# Altium PCB MOTHERBOARD.PcbDoc (part 3 of 3)
Units mil, origin at the board's own origin, x right, y up, seen from the top; angles counter-clockwise.
Board outline 7367.75 x 3037.04 mil, 4 copper layers (Top Layer, Top, Mid-Layer 1, Mid-Layer 2, Bottom Layer, Bottom), stack 18.2 mil thick; 247 components, 239 nets, 1097 pads, 323 vias.
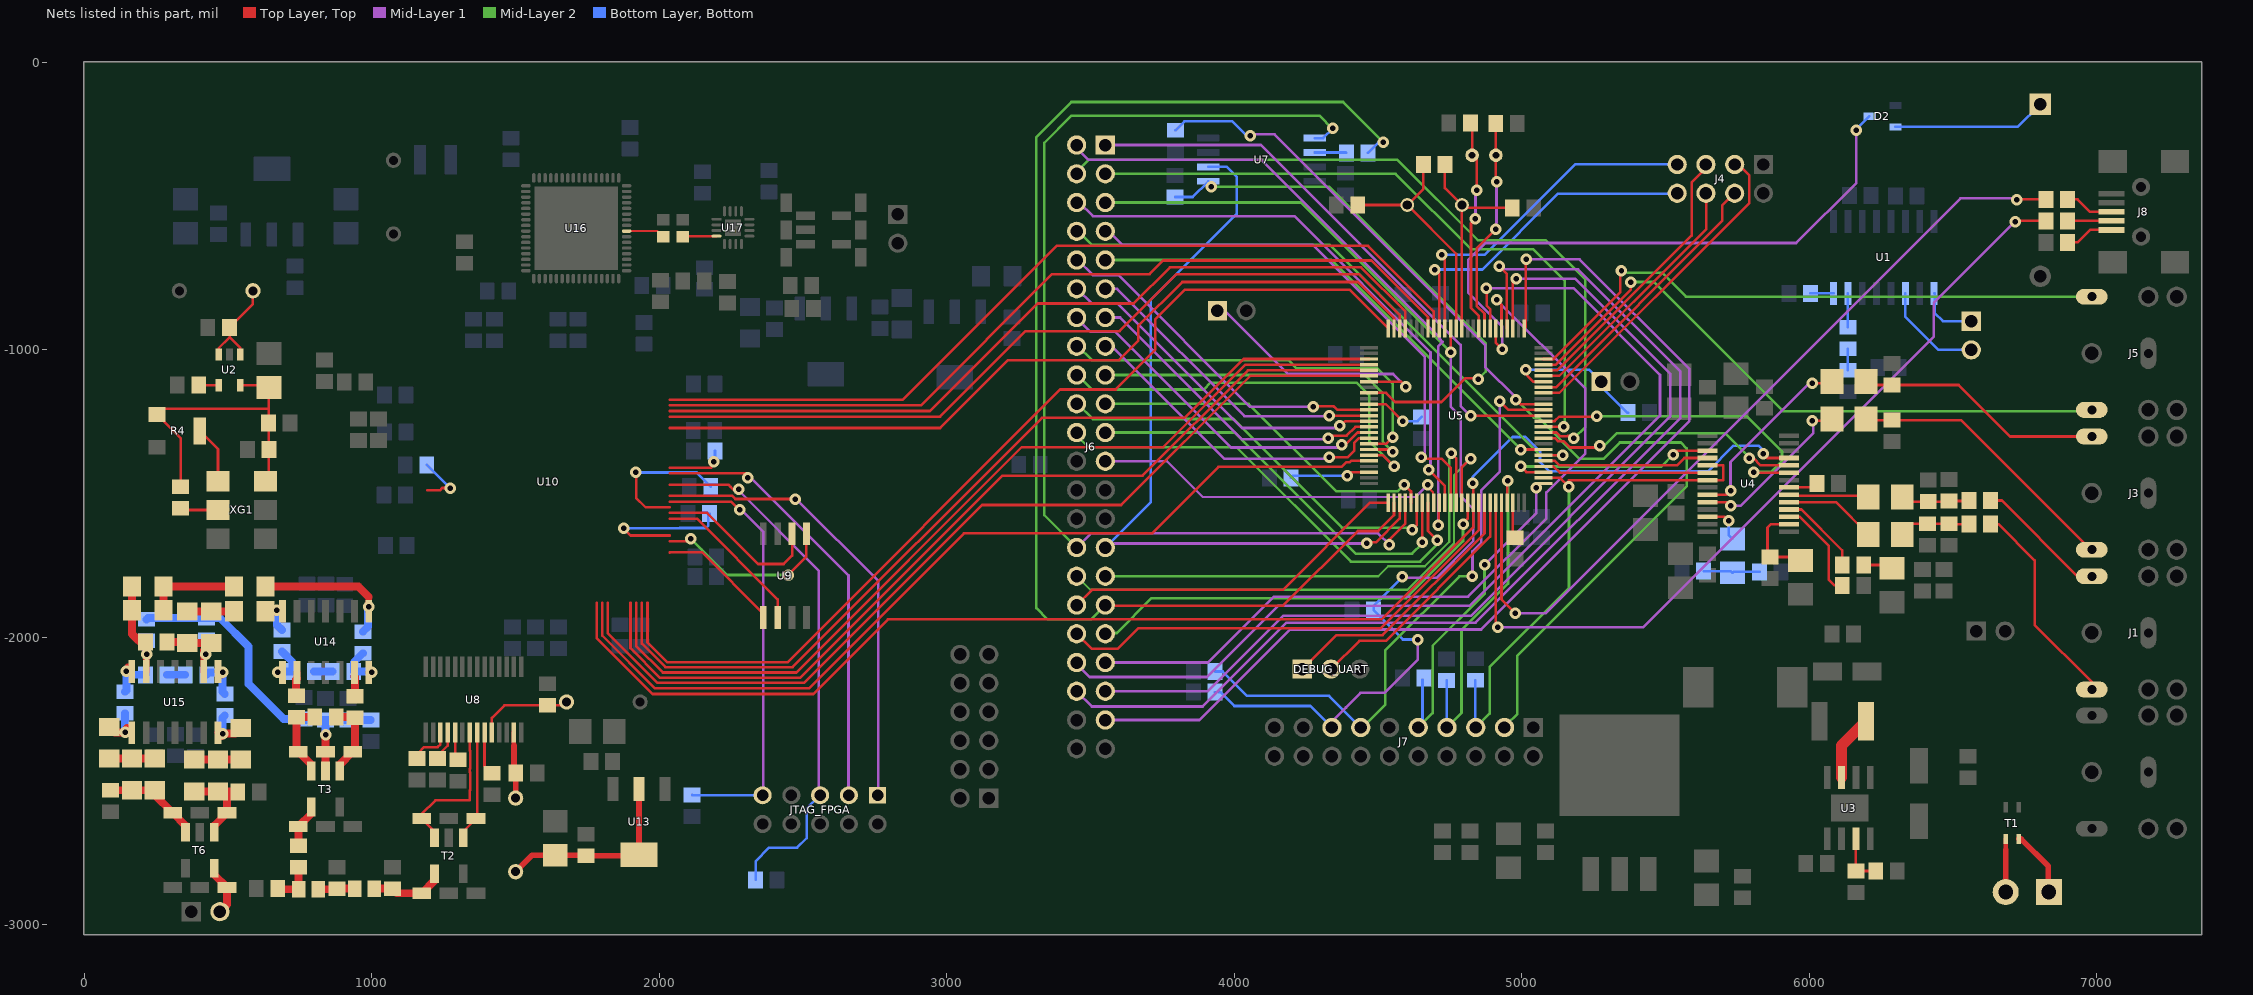
[diagram p5: the nets of this part, all layers, seen from the top]

## Via types
v1: diameter 40, hole 19.12, Top Layer, Top to Bottom Layer, Bottom, tented both sides, 262 vias
v2: diameter 40, hole 19.13, Top Layer, Top to Bottom Layer, Bottom, tented both sides, 51 vias
v3: diameter 157.48, hole 118.11, Top Layer, Top to Bottom Layer, Bottom, 6 vias
v4: diameter 40, hole 19.12, Top Layer, Top to Bottom Layer, Bottom, 3 vias
v5: diameter 19.68, hole 7.87, Top Layer, Top to Bottom Layer, Bottom, tented both sides, 1 vias

## Nets (pads, with @x,y where several pads share a name; then routed paths per layer and width w, separated by ;. In a path a pad name is that pad's centre, name@x,y a point inside that pad or via, vN(x,y) a via of type N, cw(c..) or ccw(c..) an arc to the next point about the centre after c; other vN are vias at no path point) (continued)
NetR69_1: R69.1 U17.8 | length 118.9
  Top Layer, Top w7.87: R69.1@2080.71,-606.3 2082.68,-604.33 U17.8@2198.82,-604.33
NetR69_2: R69.2 U16.8 | length 136.1
  Top Layer, Top w7.87: U16.8@1885.83,-586.61 1992.13,-586.61 2011.81,-606.3 R69.2@2013.78,-606.3
PA0: U5.22 U10.31 | length 2888.8
  Top Layer, Top w9.06: U10.31@2035.43,-1212.6 2940.94,-1212.6 3314.96,-838.58 3649.61,-838.58 3775.59,-712.6 4440.94,-712.6 4594.49,-866.14 U5.22@4594.49,-925.2
PA1: U5.23 U10.30 | length 2850.8
  Top Layer, Top w9.06: U10.30@2035.43,-1232.28 2976.38,-1232.28 3273.66,-935 3600.43,-935 3799.21,-736.22 4433.07,-736.22 4574.8,-877.95 U5.23@4574.8,-925.2
PA2: U5.24 U10.28 | length 2847.7
  Top Layer, Top w9.06: U10.28@2035.43,-1271.65 2976.38,-1271.65 3208.03,-1040 3212.6,-1035.43 3598.43,-1035.43 3665.35,-968.5 3665.35,-917.32 3818.9,-763.78 4429.13,-763.78 4555.12,-889.76 U5.24@4555.12,-925.2
PA3: U5.25 U10.144 | length 3397.2
  Top Layer, Top w9.06: U10.144@1958.66,-1879.92 1958.66,-2017.4 2027.88,-2086.61 2444.88,-2086.61 3393.7,-1137.8 3586.61,-1137.8 3724.41,-1000 3724.41,-893.7 3826.77,-791.34 4401.57,-791.34 U5.25@4535.43,-925.2
PA4: U5.28 U10.143 | length 3149.2
  Top Layer, Top w9.06: U10.143@1938.98,-1879.92 1938.98,-2021.65 2020.87,-2103.54 2463.39,-2103.54 3330.71,-1236.22 3826.77,-1236.22 4031.5,-1031.5 U5.28@4468.5,-1031.5
PA5: U5.29 U10.142 | length 3180.7
  Top Layer, Top w9.06: U10.142@1919.29,-1879.92 1919.29,-2029.53 2011.81,-2122.05 2476.38,-2122.05 3259.84,-1338.58 3751.97,-1338.58 4039.37,-1051.18 U5.29@4468.5,-1051.18
PA6: U5.30 U10.141 | length 3212.2
  Top Layer, Top w9.06: U10.141@1899.61,-1879.92 1899.61,-2037.4 2002.76,-2140.55 2489.37,-2140.55 3192.91,-1437.01 3681.1,-1437.01 4047.24,-1070.87 U5.30@4468.5,-1070.87
PA7: U5.31 U10.137 | length 3266.8
  Top Layer, Top w9.06: U10.137@1820.87,-1879.92 1820.87,-1986.22 1992.13,-2157.48 2503.94,-2157.48 3122.05,-1539.37 3606.3,-1539.37 4055.12,-1090.55 U5.31@4468.5,-1090.55
PA8: J6.36 U5.67 | length 1686.5
  Top Layer, Top w9.06: J6.36@3451.18,-1987.4 3503.15,-2039.37 3594.49,-2039.37 3665.35,-1968.5 4507.87,-1968.5 4850.39,-1625.98 U5.67@4850.39,-1531.5
PA9: DEBUG_UART.1 U5.68 | length 935.8
  Top Layer, Top w9.06: DEBUG_UART.1@4236.22,-2110.24 4354.33,-1992.13 4515.75,-1992.13 4870.08,-1637.8 U5.68@4870.08,-1531.5
PA10: DEBUG_UART.2 U5.69 | length 862.5
  Top Layer, Top w9.06: DEBUG_UART.2@4336.22,-2110.24 4434.65,-2011.81 4527.56,-2011.81 4889.76,-1649.61 U5.69@4889.76,-1531.5
PA15: J7.5 R35.2 U4.5 U4.7 U5.77 | length 1905.2
  Top Layer, Top w9.06: U5.77@5074.8,-1444.88 5133.37,-1444.88 v1(5163.74,-1475.25) 5163.74,-1452.76 5700.79,-1452.76 5700.79,-1401.57 U4.5@5645.67,-1401.57
  Mid-Layer 2 w9.06: J7.5@4839.37,-2313.39 4887.78,-2264.98 4887.78,-2103.63 5163.74,-1827.67 v1(5163.74,-1475.25)
  Bottom Layer, Bottom w9.06: R35.2@4837.89,-2148.69 4837.89,-2311.91 J7.5@4839.37,-2313.39
PB6: J4.3 U5.92 | length 1152.2
  Top Layer, Top w9.06: U5.92@5074.8,-1149.61 5129.92,-1149.61 5791.34,-488.19 5791.34,-393.7 5752.76,-355.12 J4.3@5740.16,-355.12
PB7: J4.4 U5.93 | length 975.8
  Top Layer, Top w9.06: U5.93@5074.8,-1129.92 5118.11,-1129.92 5696.85,-551.18 5696.85,-498.43 J4.4@5740.16,-455.12
PB8: J4.6 U5.95 | length 903.2
  Top Layer, Top w9.06: U5.95@5074.8,-1090.55 5129.92,-1090.55 5641.73,-578.74 5641.73,-456.69 J4.6@5640.16,-455.12
PB9: J4.5 U5.96 | length 995.4
  Top Layer, Top w9.06: U5.96@5074.8,-1070.87 5122.05,-1070.87 5590.55,-602.36 5590.55,-417.32 5652.76,-355.12 J4.5@5640.16,-355.12
PB10: U5.46 U10.136 | length 3185.1
  Top Layer, Top w9.06: U10.136@1801.18,-1879.92 1801.18,-1994.09 1984.25,-2177.17 2519.69,-2177.17 3059.06,-1637.8 3712.6,-1637.8 3943.98,-1406.42 4373.11,-1406.42 4388.58,-1390.94 4400.71,-1390.94 4405.83,-1385.83 U5.46@4468.5,-1385.83
PB12: J6.34 U5.51 | length 1231.7
  Top Layer, Top w9.06: J6.34@3451.18,-1887.4 3503.94,-1834.65 4169.29,-1834.65 4472.44,-1531.5 U5.51@4535.43,-1531.5
PB13: J6.33 R40.2 U5.52 | length 4483
  Top Layer, Top w9.06: J6.33@3551.18,-1887.4 3548.82,-1889.76 4169.29,-1889.76 4429.13,-1629.92 4500,-1629.92 4555.12,-1574.8 U5.52@4555.12,-1531.5
  Mid-Layer 2 w9.06: J6.33@3551.18,-1887.4 3501.57,-1937.01 3350.39,-1937.01 3311.02,-1897.64 3311.02,-259.84 3433.07,-137.8 4377.95,-137.8 4517.11,-276.96 v1(4518.17,-276.96)
  Bottom Layer, Bottom w9.06: R40.2@4464.37,-314.76 4502.18,-276.96 v1(4518.17,-276.96)
PB14: J6.29 U5.53 U7.2 | length 2712
  Top Layer, Top w9.06: v1(4460.63,-1673.23) 4464.57,-1669.29 4492.13,-1669.29 4574.8,-1586.61 U5.53@4574.8,-1531.5
  Mid-Layer 1 w9.06: J6.29@3551.18,-1687.4 3565.35,-1673.23 v1(4460.63,-1673.23)
  Bottom Layer, Bottom w9.06: J6.29@3551.18,-1687.4 3708.66,-1529.92 3708.66,-826.77 4007.87,-527.56 4007.87,-397.64 3973.62,-363.39 U7.2@3909.45,-363.39
PB15: J6.30 U5.54 U7.5 | length 3889.1
  Top Layer, Top w9.06: v1(4539.37,-1677.17) 4539.37,-1658.9 4594.49,-1603.78 U5.54@4594.49,-1531.5
  Mid-Layer 1 w9.06: J6.30@3451.18,-1687.4 3500.79,-1637.8 4500,-1637.8 v1(4539.37,-1677.17)
  Mid-Layer 2 w9.06: J6.30@3451.18,-1687.4 3338.58,-1574.8 3338.58,-279.53 3433.07,-185.04 4295.28,-185.04 4341.15,-230.92 4342.24,-232 v1(4342.24,-229.83)
  Bottom Layer, Bottom w9.06: U7.5@4279.53,-263.39 4308.69,-263.39 v1(4342.24,-229.83)
PC0: J4.7 U5.15 | length 1217.6
  Top Layer, Top w9.06: v1(4720.47,-669.29) 4732.28,-681.1 U5.15@4732.28,-925.2
  Bottom Layer, Bottom w9.06: v1(4720.47,-669.29) 4870.08,-669.29 5185.04,-354.33 5543.31,-354.33 5542.52,-355.12 J4.7@5540.16,-355.12
PC1: J4.8 U5.16 | length 1165.4
  Top Layer, Top w9.06: v1(4696.85,-720.47) 4712.6,-736.22 U5.16@4712.6,-925.2
  Bottom Layer, Bottom w9.06: v1(4696.85,-720.47) 4862.2,-720.47 5125.98,-456.69 5540.16,-456.69 J4.8@5540.16,-455.12
PC2: U5.17 U10.33 | length 3032.9
  Top Layer, Top w9.06: U10.33@2035.43,-1173.23 2846.46,-1173.23 3381.89,-637.8 4464.57,-637.8 4692.91,-866.14 U5.17@4692.91,-925.2
PC3: U5.18 U10.32 | length 2967.4
  Top Layer, Top w9.06: U10.32@2035.43,-1192.91 2909.45,-1192.91 3366.14,-736.22 3704.72,-736.22 3751.97,-688.98 4476.38,-688.98 4673.23,-885.83 U5.18@4673.23,-925.2
PC4: PTT_IN.1 U5.32 | length 898.5
  Top Layer, Top w9.06: U5.32@4468.5,-1110.24 4578.8,-1110.24 v1(4595.92,-1127.35)
  Mid-Layer 1 w9.06: PTT_IN.1@3941.04,-863.86 3967.5,-863.86 4187.25,-1083.61 4552.19,-1083.61 v1(4595.92,-1127.35)
PC6: J6.31 U5.63 | length 1735.4
  Top Layer, Top w9.06: v1(4753.55,-1359.74) 4771.65,-1377.85 U5.63@4771.65,-1531.5
  Mid-Layer 2 w7.87: J6.31@3551.18,-1787.4 4500,-1787.4 4534.84,-1752.56 4662.18,-1752.56 4747.71,-1667.03 4747.71,-1365.58 v1(4753.55,-1359.74)
PC7: J6.32 U5.64 | length 1884.2
  Top Layer, Top w9.06: U5.64@4791.34,-1531.5 4791.34,-1407.95 v1(4821.38,-1377.91)
  Mid-Layer 2 w7.87: J6.32@3451.18,-1787.4 3498.43,-1834.65 4602.36,-1834.65 4763.45,-1673.55 4763.45,-1435.83 v1(4821.38,-1377.91)
PC8: J6.35 U5.65 | length 1523.6
  Top Layer, Top w9.06: v1(4795.27,-1606.3) 4795.27,-1602.35 4811.02,-1586.59 U5.65@4811.02,-1531.5
  Mid-Layer 2 w9.06: J6.35@3551.18,-1987.4 3548.32,-1984.54 3591.07,-1984.54 3712.33,-1863.28 4597.35,-1863.28 4795.27,-1665.36 v1(4795.27,-1606.3)
PC9: U4.25 U5.66 U10.135 | length 4961.2
  Top Layer, Top w9.06: U10.135@1781.5,-1879.92 1781.5,-2001.97 1976.38,-2196.85 2535.43,-2196.85 2795.28,-1937.01 4510.91,-1937.01 4830.71,-1617.21 U5.66@4830.71,-1531.5 4830.71,-1465.51 v1(4828.98,-1463.78) ; v1(5839.22,-1362.02) 5853.19,-1375.98 U4.25@5929.13,-1375.98
  Bottom Layer, Bottom w9.06: v1(4828.98,-1463.78) 4828.98,-1441.89 4967.96,-1302.9 5012.33,-1302.9 5063.07,-1353.65 5063.07,-1390.18 5095.53,-1422.63 5647.26,-1422.63 5736.83,-1333.06 5822.51,-1333.06 5838.09,-1348.64 5838.09,-1363.16 v1(5839.22,-1362.02)
PC10: U4.3 U5.78 | length 759.3
  Top Layer, Top w9.06: v1(4996.06,-1405.51) 5015.75,-1425.2 U5.78@5074.8,-1425.2 ; v1(5525.72,-1364.67) 5539.99,-1350.39 U4.3@5645.67,-1350.39
  Mid-Layer 2 w9.06: v1(4996.06,-1405.51) 5484.87,-1405.51 v1(5525.72,-1364.67)
PC11: U4.6 U5.79 | length 579.8
  Top Layer, Top w9.06: U5.79@5074.8,-1405.51 5110.06,-1405.51 5131.71,-1427.17 U4.6@5645.67,-1427.17
PC12: U4.4 U5.80 | length 588
  Top Layer, Top w9.06: U5.80@5074.8,-1385.83 5114.49,-1385.83 5130.24,-1401.57 5539.37,-1401.57 5564.96,-1375.98 U4.4@5645.67,-1375.98
PC13: J6.38 U5.7 | length 3445.5
  Top Layer, Top w9.06: v1(4876.52,-785.4) 4877.95,-786.83 4877.95,-846.46 4889.76,-858.27 U5.7@4889.76,-925.2
  Mid-Layer 1 w9.06: J6.38@3451.18,-2087.4 3451.18,-2092.91 3496.06,-2137.8 3905.51,-2137.8 4153.54,-1889.76 4818.9,-1889.76 5480.32,-1228.35 5480.32,-1086.61 5179.1,-785.4 v1(4876.52,-785.4)
PD0: J6.8 U5.81 | length 2080.4
  Top Layer, Top w9.06: U5.81@5074.8,-1366.14 5075.24,-1366.58 5075.69,-1366.14 v1(5141.72,-1366.14)
  Mid-Layer 2 w9.06: J6.8@3451.18,-587.4 3457.48,-587.4 3505.08,-635 4331.85,-635 5062.99,-1366.14 v1(5141.72,-1366.14)
PD1: J6.9 U5.82 | length 1796.6
  Top Layer, Top w9.06: v1(4996.06,-1346.46) U5.82@5074.8,-1346.46
  Mid-Layer 2 w9.06: J6.9@3551.18,-687.4 4337.01,-687.4 v1(4996.06,-1346.46)
PD3: U4.24 U5.84 | length 936.8
  Top Layer, Top w9.06: U5.84@5074.8,-1307.09 5115.28,-1307.09 5125.24,-1317.05 5145.23,-1317.05 5167.67,-1339.49 5266.07,-1339.49 v1(5271.37,-1334.18) ; v1(5791.35,-1376.78) 5805.93,-1376.78 5830.73,-1401.57 U4.24@5929.13,-1401.57
  Mid-Layer 2 w9.06: v1(5271.37,-1334.18) 5286.07,-1334.18 5330.95,-1289.3 5706.9,-1289.3 5791.35,-1373.75 v1(5791.35,-1376.78)
PD4: J6.4 U5.85 | length 2656.1
  Top Layer, Top w9.06: U5.85@5074.8,-1287.4 5119.53,-1287.4 5132.25,-1300.12 5159.09,-1300.12 5160,-1299.21 5173.23,-1299.21 v1(5181.09,-1307.08)
  Mid-Layer 2 w9.06: J6.4@3451.18,-387.4 3454.33,-387.4 3448.82,-381.89 3492.13,-338.58 4566.93,-338.58 4846.46,-618.11 5082.68,-618.11 5220.47,-755.91 5220.47,-1267.7 v1(5181.09,-1307.08)
PD5: J6.3 U5.86 | length 2335.4
  Top Layer, Top w9.06: U5.86@5074.8,-1267.72 v1(5145.67,-1267.72)
  Mid-Layer 2 w9.06: J6.3@3551.18,-387.4 4560.63,-387.4 4822.83,-649.61 5039.37,-649.61 5149.61,-759.84 5149.61,-1267.72 v1(5145.67,-1267.72)
PD6: U4.23 U5.87 | length 1158.4
  Top Layer, Top w9.06: U5.87@5074.8,-1248.03 5114.17,-1248.03 5129.92,-1232.28 5258.95,-1232.28 v1(5261.11,-1230.13) ; v1(5806.73,-1424.75) 5809.15,-1427.17 U4.23@5929.13,-1427.17
  Mid-Layer 2 w9.06: v1(5261.11,-1230.13) 5781.65,-1230.13 5904.59,-1353.06 5904.59,-1386.03 5865.87,-1424.75 v1(5806.73,-1424.75)
PD7: J6.1 U5.88 | length 2038.5
  Top Layer, Top w9.06: v1(4822.96,-1228.35) U5.88@5074.8,-1228.35
  Mid-Layer 1 w9.06: J6.1@3551.18,-287.4 4091.93,-287.4 4786.78,-982.25 4786.78,-1195.88 4819.24,-1228.35 v1(4822.96,-1228.35)
PD8: J6.19 U5.55 | length 1248.2
  Top Layer, Top w9.06: v1(4590.55,-1468.5) 4614.17,-1492.13 U5.55@4614.17,-1531.5
  Mid-Layer 2 w9.06: J6.19@3551.18,-1187.4 4049.61,-1187.4 4354.33,-1492.13 4566.93,-1492.13 v1(4590.55,-1468.5)
PD9: J6.20 U5.56 | length 1449.6
  Top Layer, Top w9.06: v1(4618.11,-1625.98) 4633.86,-1610.24 U5.56@4633.86,-1531.5
  Mid-Layer 2 w9.06: J6.20@3451.18,-1187.4 3455.12,-1187.4 3507.87,-1240.16 3996.06,-1240.16 4374.02,-1618.11 4610.24,-1618.11 v1(4618.11,-1625.98)
PD10: J6.21 U5.57 | length 1434
  Top Layer, Top w9.06: v1(4653.54,-1669.29) U5.57@4653.54,-1531.5
  Mid-Layer 2 w9.06: J6.21@3551.18,-1287.4 4000,-1287.4 4422.17,-1709.57 4552.79,-1709.57 4553.7,-1708.66 4618.11,-1708.66 4653.54,-1673.23 v1(4653.54,-1669.29)
PD11: J6.22 U5.58 | length 1630.9
  Top Layer, Top w9.06: U5.58@4673.23,-1531.5 4673.23,-1629.92 v1(4704.72,-1661.42)
  Mid-Layer 2 w9.06: J6.22@3451.18,-1287.4 3451.18,-1297.64 3492.13,-1338.58 4007.87,-1338.58 4405.51,-1736.22 4645.67,-1736.22 4700.79,-1681.1 4700.79,-1661.42 v1(4704.72,-1661.42)
PD12: J6.23 U5.59 | length 1262.7
  Top Layer, Top w7.87: v2(4673.23,-1468.5) 4673.23,-1477.2 4690.94,-1494.91 4690.94,-1529.53 U5.59@4692.91,-1531.5
  Mid-Layer 1 w7.87: J6.23@3551.18,-1387.4 3765.35,-1387.4 3889.76,-1511.81 4629.92,-1511.81 v2(4673.23,-1468.5)
PD13: J6.2 U5.60 | length 2295.5
  Top Layer, Top w9.06: v1(4708.65,-1610.23) 4714.09,-1610.23 4711.22,-1607.36 4711.22,-1532.87 U5.60@4712.6,-1531.5
  Mid-Layer 1 w9.06: J6.2@3451.18,-287.4 3451.18,-297.64 3492.13,-338.58 4094.49,-338.58 4712.6,-956.69 4712.6,-960.32 4724.41,-972.13 4708.65,-987.88 v1(4708.65,-1610.23)
PD14: J6.6 U5.61 | length 1995.1
  Top Layer, Top w9.06: v1(4676.25,-1417.32) 4732.28,-1473.36 U5.61@4732.28,-1531.5
  Mid-Layer 1 w9.06: J6.6@3451.18,-487.4 3459.84,-487.4 3507.44,-535 4208.23,-535 4682.01,-1008.78 4682.01,-1411.57 v1(4676.25,-1417.32)
PD15: J6.7 U5.62 | length 1900.6
  Top Layer, Top w9.06: v1(4649.61,-1374.02) 4653.54,-1377.95 4720.47,-1377.95 4751.97,-1409.45 U5.62@4751.97,-1531.5
  Mid-Layer 1 w9.06: J6.7@3551.18,-587.4 3551.18,-576.58 3556.59,-581.99 3608.41,-633.81 4271.6,-633.81 4661.42,-1023.62 4661.42,-1362.2 v1(4649.61,-1374.02)
PE0: J5.3 U5.97 | length 2230.4
  Top Layer, Top w9.06: U5.97@5074.8,-1051.18 5117.79,-1051.18 5377.95,-791.02 v1(5377.95,-763.78)
  Mid-Layer 2 w9.06: v1(5377.95,-763.78) 5458.85,-763.78 5908.12,-1213.05 6977.89,-1213.05 J5.3@6982.28,-1208.66
PE1: J5.2 U5.98 | length 2115.6
  Top Layer, Top w9.06: U5.98@5074.8,-1031.5 5110.24,-1031.5 5342.52,-799.21 5342.52,-728.33 v1(5346.45,-724.41)
  Mid-Layer 2 w9.06: v1(5346.45,-724.41) 5346.45,-726.36 5352.37,-732.28 5353.28,-731.38 5486.93,-731.38 5570.51,-814.96 J5.2@6982.28,-814.96
PE2: J6.41 U5.1 | length 3611.7
  Top Layer, Top w9.06: U5.1@5007.87,-925.2 5012.72,-920.35 5012.72,-688.07 v1(5015.75,-685.04)
  Mid-Layer 1 w9.06: J6.41@3551.18,-2287.4 3877.95,-2287.4 4192.91,-1972.44 4858.27,-1972.44 5582.68,-1248.03 5582.68,-1066.93 5200.79,-685.04 v1(5015.75,-685.04)
PE4: J6.39 U5.3 | length 3360.3
  Top Layer, Top w9.06: U5.3@4968.5,-925.2 4968.5,-763.78 v1(4980.32,-751.97)
  Mid-Layer 1 w9.06: J6.39@3551.18,-2187.4 3907.09,-2187.4 4169.29,-1925.2 4822.83,-1925.2 5515.75,-1232.28 5515.75,-1082.68 5185.04,-751.97 v1(4980.32,-751.97)
PE5: J6.40 U5.4 | length 3708.6
  Top Layer, Top w9.06: v1(4921.26,-708.66) 4947.91,-735.31 4947.91,-924.29 U5.4@4948.82,-925.2
  Mid-Layer 1 w9.06: J6.40@3451.18,-2187.4 3503.94,-2240.16 3889.76,-2240.16 4181.1,-1948.82 4838.58,-1948.82 5551.18,-1236.22 5551.18,-1074.8 5195.94,-719.57 4932.17,-719.57 v1(4921.26,-708.66)
PE6: J6.37 U5.5 | length 2791
  Top Layer, Top w9.06: v1(4912.45,-826.34) 4929.13,-843.02 U5.5@4929.13,-925.2
  Mid-Layer 1 w9.06: J6.37@3551.18,-2087.4 3908.66,-2087.4 4137.8,-1858.27 4813.28,-1858.27 5084.87,-1586.68 5084.87,-1495.33 5220.47,-1359.72 5220.47,-1134.36 v1(4912.45,-826.34)
PE7: J6.10 U5.37 | length 1234.7
  Top Layer, Top w9.06: v1(4274.21,-1197.74) 4276.01,-1195.94 4344.12,-1195.94 4345.03,-1196.85 4346.14,-1196.85 4357.95,-1208.66 U5.37@4468.5,-1208.66
  Mid-Layer 1 w9.06: J6.10@3451.18,-687.4 3455.12,-687.4 3507.87,-740.16 3596.63,-740.16 4054.21,-1197.74 v1(4274.21,-1197.74)
PE8: J6.11 U5.38 | length 1101.5
  Top Layer, Top w9.06: v1(4330.7,-1228.34) U5.38@4468.5,-1228.35
  Mid-Layer 1 w9.06: J6.11@3551.18,-787.4 3592.47,-787.4 4035.21,-1230.14 4328.91,-1230.14 v1(4330.7,-1228.34)
PE9: J6.12 U5.39 | length 1227.7
  Top Layer, Top w9.06: v1(4366.13,-1263.78) 4370.08,-1263.78 4385.83,-1248.03 U5.39@4468.5,-1248.03
  Mid-Layer 1 w9.06: J6.12@3451.18,-787.4 3452.76,-787.4 3503.94,-838.58 3593.67,-838.58 4026.74,-1271.65 4358.26,-1271.65 v1(4366.13,-1263.78)
PE10: J6.13 U5.40 | length 1110.7
  Top Layer, Top w9.06: v1(4326.77,-1307.09) 4334.65,-1299.21 4359.69,-1299.21 4360.59,-1298.31 4390.67,-1298.31 4421.26,-1267.72 U5.40@4468.5,-1267.72
  Mid-Layer 1 w9.06: J6.13@3551.18,-887.4 3602.51,-887.4 4026.13,-1311.02 4322.83,-1311.02 v1(4326.77,-1307.09)
PE11: J6.14 U5.41 | length 1226.6
  Top Layer, Top w9.06: v1(4374.02,-1330.71) 4385.51,-1330.71 4428.81,-1287.4 U5.41@4468.5,-1287.4
  Mid-Layer 1 w9.06: J6.14@3451.18,-887.4 3451.18,-888.19 3500,-937.01 3586.43,-937.01 3988.91,-1339.49 4365.24,-1339.49 v1(4374.02,-1330.71)
PE12: J6.15 U5.42 | length 1124.6
  Top Layer, Top w9.06: v1(4330.71,-1374.02) 4393.7,-1374.02 4417.32,-1350.39 4417.32,-1322.83 4433.07,-1307.09 U5.42@4468.5,-1307.09
  Mid-Layer 1 w9.06: J6.15@3551.18,-987.4 3573.98,-987.4 3964.54,-1377.95 4326.77,-1377.95 v1(4330.71,-1374.02)
PE13: J6.16 U5.43 | length 1431.6
  Top Layer, Top w9.06: U5.43@4468.5,-1326.77 4527.56,-1326.77 v1(4551.18,-1303.15)
  Mid-Layer 2 w9.06: J6.16@3451.18,-987.4 3455.91,-987.4 3503.94,-1035.43 4187.44,-1035.43 4216.59,-1064.58 4497.65,-1064.58 4551.18,-1118.11 v1(4551.18,-1303.15)
PE14: J6.17 U5.44 | length 1300
  Top Layer, Top w9.06: U5.44@4468.5,-1346.46 4543.31,-1346.46 v1(4551.18,-1354.33)
  Mid-Layer 2 w9.06: J6.17@3550,-1095 3557.6,-1087.4 4453.54,-1087.4 4515.75,-1149.61 4515.75,-1318.9 v1(4551.18,-1354.33)
PE15: J6.18 U5.45 | length 1453.5
  Top Layer, Top w9.06: U5.45@4468.5,-1366.14 4515.75,-1366.14 4554.67,-1405.06 v1(4556.09,-1405.06)
  Mid-Layer 2 w9.06: J6.18@3451.18,-1087.4 3453.54,-1087.4 3503.94,-1137.8 3893.7,-1137.8 3917.32,-1114.17 4425.2,-1114.17 4468.5,-1157.48 4468.5,-1317.48 v1(4556.09,-1405.06)
STM_NRST: C57.2 J6.5 J7.15 R33.1 U5.14 | length 3795.1
  Top Layer, Top w9.06: v1(4751.97,-1007.87) U5.14@4751.97,-925.2
  Mid-Layer 1 w9.06: J7.15@4339.37,-2313.39 4339.37,-2316.85 4337.64,-2315.12 4327.61,-2305.09 4388.3,-2244.4 4388.3,-2243.09 4438.41,-2192.98 4521.34,-2192.98 4637.86,-2076.46 v1(4637.86,-2007.38) ; v1(4584.69,-1789.85) 4587.77,-1792.94 4703.13,-1792.94 4830.79,-1665.28 4830.79,-1553.3 4787.79,-1510.3 4787.79,-1232.67 4751.97,-1196.85 v1(4751.97,-1007.87)
  Mid-Layer 2 w9.06: J6.5@3551.18,-487.4 4231.5,-487.4 v1(4751.97,-1007.87)
  Bottom Layer, Bottom w9.06: R33.1@3932.56,-2190.63 3952,-2190.63 3999.93,-2238.56 4264.54,-2238.56 J7.15@4339.37,-2313.39 ; v1(4584.69,-1789.85) 4484.04,-1890.5 C57.2@4484.04,-1905.25 4586.17,-2007.38 v1(4637.86,-2007.38)
"彦螯 0": C25.1 U4.20 | length 281.2
  Top Layer, Top w9.06: U4.20@5929.13,-1503.94 5929.13,-1507.87 6200.79,-1507.87 C25.1@6204.72,-1511.81
"彦螯 1": R24.2 U10.92 | length 196.1
  Top Layer, Top w9.06: U10.92@1192.91,-1488.19 1236.22,-1488.19 1244.09,-1480.32 v1(1271.65,-1480.32)
  Bottom Layer, Bottom w9.06: R24.2@1190.94,-1399.61 v1(1271.65,-1480.32)
"彦螯 3": U9.2 U10.13 | length 587.8
  Top Layer, Top w9.06: U10.13@2035.43,-1566.93 2166.11,-1566.93 2343.71,-1744.53 2432.11,-1744.53 2461.66,-1714.98 2461.66,-1639.49 U9.2@2461.44,-1639.27
"彦螯 4": R4.2 XG1.1 | length 201.3
  Top Layer, Top w9.06: R4.2@401.57,-1281.5 464.57,-1344.49 XG1.1@464.57,-1456.69
"彦螯 6": R3.2 XG1.2 | length 132.2
  Top Layer, Top w9.06: R3.2@334.65,-1551.18 340.16,-1556.69 XG1.2@464.57,-1556.69
"彦螯 8": C36.2 L5.1 U8.27 | length 230.8
  Top Layer, Top w15.75: 1494.09,-2375.98 U8.27@1494.09,-2330.71
  Top Layer, Top w19.68: 1494.09,-2375.98 1494.09,-2466.54 C36.2@1500,-2472.44 L5.1@1500,-2559.06
"彦螯 9": C37.2 T3.4 T3.11 | length 152.7
  Top Layer, Top w27.56: C37.2@744.09,-2724.41 T3.4@744.09,-2657.48 788.58,-2612.99 T3.11@788.58,-2590.16
"彦螯 10": C93.2 C104.2 R25.1 R49.1 R64.1 R65.2 T3.2 T3.8 | length 1183.9
  Top Layer, Top w27.56: T3.8@838.58,-2464.96 T3.2@838.58,-2397.64 v1(838.58,-2338.58)
  Bottom Layer, Bottom w27.56: R65.2@216.54,-1937.01 220.47,-1933.07 R64.1@425.2,-1933.07 472.44,-1933.07 570.87,-2031.5 570.87,-2161.42 692.91,-2283.46 R49.1@763.78,-2283.46 763.78,-2287.4 C93.2@838.58,-2287.4 ; v1(838.58,-2338.58) C93.2@838.58,-2287.4 ; R25.1@996.06,-2287.4 C104.2@917.32,-2287.4 C93.2@838.58,-2287.4
"彦螯 11": R59.2 R61.1 U14.1 | length 152.9
  Top Layer, Top w23.62: v1(673.23,-2122.05) U14.1@688.98,-2122.05
  Bottom Layer, Bottom w27.56: v1(673.23,-2122.05) 677.17,-2118.11 R61.1@724.41,-2118.11 724.41,-2086.61 R59.2@687.01,-2049.21
"彦螯 27": C3.2 L6.1 U8.24 | length 333.9
  Top Layer, Top w9.06: U8.24@1417.32,-2330.71 1417.32,-2279.53 1460.63,-2236.22 C3.2@1610.24,-2236.22 1665.35,-2236.22 L6.1@1677.17,-2224.41
"彦螯 31": C101.1 R50.2 U15.7 | length 179.2
  Top Layer, Top w23.62: v1@151.32,-2104.86 U15.7@164.96,-2118.5
  Top Layer, Top w27.56: v1(145.67,-2118.11) 151.32,-2112.46 v1@151.32,-2104.86
  Bottom Layer, Bottom w27.56: R50.2@141.73,-2188.98 145.67,-2185.04 v1(145.67,-2118.11) 157.48,-2129.92 C101.1@212.6,-2129.92
"彦螯 34": R13.2 U4.21 | length 103.2
  Top Layer, Top w9.06: U4.21@5929.13,-1478.35 6013.08,-1478.35 R13.2@6026.69,-1464.73
"彦螯 35": R50.1 R55.2 U15.8 | length 172.3
  Top Layer, Top w23.62: v1@148.53,-2314.67 U15.8@164.96,-2331.1
  Top Layer, Top w27.56: R55.2@86.61,-2311.02 106.3,-2330.71 v1(141.73,-2330.71) 148.53,-2323.91 v1@148.53,-2314.67
  Bottom Layer, Bottom w27.56: v1(141.73,-2330.71) R50.1@141.73,-2263.78
"彦螯 36": C102.2 C106.2 R52.1 | length 161.4
  Top Layer, Top w27.56: C106.2@381.89,-2425.2 C102.2@464.57,-2425.2 R52.1@543.31,-2425.2
"彦螯 37": C103.2 C105.2 R55.1 | length 157.5
  Top Layer, Top w27.56: R55.1@86.61,-2421.26 C103.2@165.35,-2421.26 C105.2@244.09,-2421.26
"彦螯 38": C103.1 C105.1 R57.1 T6.3 T6.9 | length 344.1
  Top Layer, Top w27.56: R57.1@90.55,-2531.5 C103.1@165.35,-2531.5 C105.1@244.09,-2531.5 244.09,-2547.24 T6.3@307.09,-2610.24 351.57,-2654.72 T6.9@351.57,-2677.56
"彦螯 39": C102.1 C106.1 R56.2 T6.1 T6.7 | length 345.6
  Top Layer, Top w27.56: C106.1@381.89,-2535.43 C102.1@464.57,-2535.43 ; T6.7@451.57,-2677.56 451.57,-2654.72 T6.1@496.06,-2610.24 C102.1@496.06,-2535.43 ; R56.2@533.46,-2537.4 533.46,-2535.43 C102.1@496.06,-2535.43 ; C102.1@464.57,-2535.43 C102.1@496.06,-2535.43 ; C102.1@464.57,-2535.43 C102.1@496.06,-2535.43
"彦螯 41": C63.1 L2.2 L4.1 | length 128.8
  Top Layer, Top w27.56: L4.1@812.99,-2875.98 875.98,-2875.98 C63.1@877.95,-2874.02 L2.2@940.94,-2874.02
"彦螯 44": R53.2 R54.1 T3.3 T3.9 | length 271.3
  Top Layer, Top w27.56: T3.9@788.58,-2464.96 788.58,-2442.13 T3.3@744.09,-2397.64 738.19,-2391.73 R54.1@738.19,-2277.56 R53.2@801.18,-2277.56
"彦螯 45": R54.2 U14.2 | length 82.7
  Top Layer, Top w23.62: U14.2@738.98,-2142.91 U14.2@738.98,-2122.05
  Top Layer, Top w27.56: R54.2@738.19,-2202.76 736.22,-2200.79 736.22,-2145.67 U14.2@738.98,-2142.91
"彦螯 46": R58.1 U14.6 | length 83.5
  Top Layer, Top w23.62: U14.6@938.98,-2135.83 U14.6@938.98,-2122.05
  Top Layer, Top w27.56: U14.6@938.98,-2135.83 940.94,-2137.8 R58.1@940.94,-2204.72
"彦螯 47": C107.1 R60.2 U14.7 | length 151.7
  Top Layer, Top w23.62: U14.7@988.98,-2122.05 v1(1000,-2122.05)
  Bottom Layer, Bottom w27.56: R60.2@968.5,-2055.12 937.01,-2086.61 C107.1@937.01,-2118.11 996.06,-2118.11 v1(1000,-2122.05)
"彦螯 48": C107.2 R61.2 | length 63
  Bottom Layer, Bottom w27.56: R61.2@799.21,-2118.11 C107.2@862.2,-2118.11
"彦螯 49": C7.2 L3.2 U2.1 U2.3 | length 347.8
  Top Layer, Top w9.06: U2.3@467.07,-1016 467.07,-994.21 504.84,-956.44 504.84,-955.02 ; U2.1@541.87,-1016 541.87,-992.05 504.84,-955.02 ; L3.2@586.08,-794.31 586.08,-840.56 C7.2@504.28,-922.36 504.84,-922.92 504.84,-955.02
"彦螯 50": R1.2 R2.1 U3.3 | length 181.5
  Top Layer, Top w9.06: R1.2@6161.85,-2812.33 6230.41,-2812.33 R2.1@6230.69,-2812.04 ; R1.2@6161.85,-2812.33 U3.3@6161.85,-2699.77
"彦螯 51": R59.1 R62.2 U14.14 | length 145.1
  Top Layer, Top w23.62: v1@663.39,-1909.45 U14.14@688.98,-1909.45
  Top Layer, Top w27.56: R62.2@629.92,-1909.45 663.39,-1909.45 663.39,-1905.51 v1(669.29,-1905.51)
  Bottom Layer, Bottom w27.56: v1(669.29,-1905.51) 669.29,-1956.69 R59.1@687.01,-1974.41
"彦螯 52": C12.1 R8.2 | length 74.8
  Bottom Layer, Bottom w9.06: C12.1@6133.86,-1070.87 R8.2@6133.86,-996.06
"彦螯 53": C31.2 C32.1 U4.16 | length 296.5
  Top Layer, Top w9.06: U4.16@5929.13,-1606.3 5866.14,-1606.3 5854.33,-1618.11 5854.33,-1712.6 C31.2@5862.2,-1720.47 5956.69,-1720.47 C32.1@5968.5,-1732.28
"彦螯 54": U9.6 U10.12 | length 555.1
  Top Layer, Top w9.06: U10.12@2035.43,-1586.61 2035.57,-1586.75 2130.13,-1586.75 2411.44,-1868.05 U9.6@2411.44,-1930.61
"彦螯 55": C108.2 C111.2 R62.1 | length 161.4
  Top Layer, Top w27.56: C111.2@358.27,-1909.45 C108.2@440.94,-1909.45 R62.1@519.69,-1909.45
"彦螯 57": C35.2 R17.2 R18.1 | length 199
  Bottom Layer, Bottom w9.06: R17.2@5631.89,-1769.69 5726.38,-1769.69 C35.2@5732.28,-1775.59 5736.22,-1771.65 R18.1@5826.77,-1771.65
"彦螯 59": T2.3 T2.9 U8.21 | length 526.9
  Top Layer, Top w9.06: T2.9@1217.72,-2697.24 1217.72,-2674.41 T2.3@1173.23,-2629.92 1173.23,-2614.17 1220.47,-2566.93 1340.55,-2566.93 1340.55,-2532.39 1341.93,-2531.01 1341.93,-2469.56 1340.55,-2468.18 1340.55,-2457.59 1341.93,-2456.21 1341.93,-2394.76 1340.55,-2393.38 U8.21@1340.55,-2330.71
"彦螯 60": R27.2 U5.36 | length 213.3
  Top Layer, Top w9.06: U5.36@4468.5,-1188.98 4526.65,-1188.98 v1(4585.31,-1247.64)
  Bottom Layer, Bottom w9.06: v1(4585.31,-1247.64) 4636.85,-1247.64 R27.2@4651.46,-1233.04
"彦螯 61": BOOT0.1 R28.2 U5.94 | length 538
  Top Layer, Top w9.06: v1(5013.59,-1068.64) 4997.78,-1068.64 5039.37,-1110.24 U5.94@5074.8,-1110.24
  Bottom Layer, Bottom w9.06: v1(5013.59,-1068.64) 5234,-1068.64 BOOT0.1@5275.59,-1110.24 5275.59,-1127.6 5366.37,-1218.37 R28.2@5369.33,-1218.37
"彦螯 62": C38.1 U5.8 Y1.2 | length 755.9
  Top Layer, Top w9.06: U5.8@4870.08,-925.2 4870.08,-874.02 4842.52,-846.46 4842.52,-646.78 v1(4909.55,-579.75) v1@4909.45,-579.75 ; v1@4909.45,-415.6 v1(4911.7,-415.6) 4909.45,-413.35 Y1.2@4909.45,-322.83 C38.1@4909.45,-212.6
  Mid-Layer 1 w9.06: v1(4909.55,-579.75) 4911.7,-577.6 v1(4911.7,-415.6)
"彦螯 63": C39.1 U5.9 Y1.1 | length 752.3
  Top Layer, Top w9.06: C39.1@4820.87,-210.63 4826.77,-216.54 Y1.1@4826.77,-322.83 4842.52,-322.83 v1(4842.52,-444.88) ; v1(4838.58,-543.31) 4822.83,-559.06 4822.83,-854.33 4850.39,-881.89 U5.9@4850.39,-925.2
  Mid-Layer 1 w9.06: v1(4838.58,-543.31) 4838.58,-448.82 v1(4842.52,-444.88)
"彦螯 64": C37.1 C71.1 L4.2 | length 152.5
  Top Layer, Top w27.56: C71.1@672,-2874.02 673.97,-2875.98 L4.2@746.06,-2875.98 744.09,-2874.02 C37.1@744.09,-2799.21
"彦螯 65": C41.2 U5.73 | length 125.3
  Top Layer, Top w9.06: U5.73@4968.5,-1531.5 4968.5,-1645.67 C41.2@4976.38,-1653.54
"彦螯 66": C42.2 R29.1 U5.12 Y2.1 | length 774.6
  Top Layer, Top w9.06: R29.1@4732.28,-354.33 4732.28,-437.01 Y2.1@4791.34,-496.06 ; U5.12@4791.34,-925.2 Y2.1@4791.34,-496.06 ; C42.2@4966.54,-505.91 4801.18,-505.91 Y2.1@4791.34,-496.06
"彦螯 67": C43.2 R29.2 U5.13 Y2.2 | length 836.9
  Top Layer, Top w9.06: C43.2@4429.13,-496.06 Y2.2@4601.34,-496.06 ; R29.2@4657.48,-354.33 4657.48,-439.92 Y2.2@4601.34,-496.06 ; U5.13@4771.65,-925.2 4771.65,-666.38 Y2.2@4601.34,-496.06
"彦螯 68": C78.1 U8.17 | length 151.7
  Top Layer, Top w9.06: C78.1@1157.48,-2421.26 1161.42,-2417.32 1161.42,-2401.57 1181.1,-2381.89 1228.35,-2381.89 1238.19,-2372.05 U8.17@1238.19,-2330.71
"彦螯 69": JTAG_FPGA.1 U10.16 | length 1594.5
  Top Layer, Top w9.06: U10.16@2035.43,-1507.87 2253.39,-1507.87 2264.21,-1518.69 2471.45,-1518.69 v1(2472.44,-1519.68)
  Mid-Layer 1 w9.06: v1(2472.44,-1519.68) 2476.65,-1519.68 2761.53,-1804.56 2761.53,-2546.48 JTAG_FPGA.1@2759.01,-2549
"彦螯 70": JTAG_FPGA.9 R32.1 U10.15 | length 1533.2
  Top Layer, Top w9.06: U10.15@2035.43,-1527.56 2249.13,-1527.56 2276.69,-1555.11 v1(2279.52,-1555.11)
  Mid-Layer 1 w9.06: v1(2279.52,-1555.11) 2284.41,-1555.11 2361.82,-1632.53 2361.82,-2546.19 JTAG_FPGA.9@2359.01,-2549
  Bottom Layer, Bottom w9.06: R32.1@2113.74,-2548.01 2114.74,-2549 JTAG_FPGA.9@2359.01,-2549
"彦螯 72": D2.3 U5.6 | length 2152.3
  Top Layer, Top w9.06: U5.6@4909.45,-925.2 4909.45,-975.61 v1(4931.48,-997.65)
  Mid-Layer 1 w9.06: v1(4931.48,-997.65) 4931.48,-918.61 4813.33,-800.46 4813.33,-687.77 4873.12,-627.97 5954.04,-627.97 6163.32,-418.69 6163.32,-236.42 v1(6163.62,-236.11)
  Bottom Layer, Bottom w9.06: v1(6163.62,-236.11) 6163.62,-232.05 D2.3@6208.66,-187.01
"彦螯 73": R16.2 U8.18 | length 105.2
  Top Layer, Top w9.06: R16.2@1228.35,-2421.26 1228.35,-2411.65 1263.78,-2376.22 U8.18@1263.78,-2330.71
"彦螯 74": B1.1 D2.2 | length 536.6
  Bottom Layer, Bottom w9.06: D2.2@6299.21,-224.41 6724.41,-224.41 B1.1@6803.15,-145.67
"彦螯 75": R26.2 R51.1 U15.1 | length 161.5
  Top Layer, Top w23.62: U15.1@464.96,-2118.5 U15.1@476.1,-2129.65
  Top Layer, Top w27.56: U15.1@476.1,-2129.65 476.1,-2126.26 v1(480.32,-2122.05)
  Bottom Layer, Bottom w27.56: R51.1@425.2,-2129.92 433.07,-2122.05 v1(480.32,-2122.05) 480.32,-2188.98 R26.2@488.19,-2196.85
"彦螯 76": C101.2 R51.2 | length 63
  Bottom Layer, Bottom w27.56: C101.2@287.4,-2129.92 R51.2@350.39,-2129.92
"彦螯 77": R26.1 R52.2 U15.14 | length 162.5
  Top Layer, Top w23.62: U15.14@464.96,-2331.1 U15.14@476.1,-2342.24
  Top Layer, Top w27.56: U15.14@476.1,-2342.24 476.1,-2338.86 v1(480.32,-2334.65) 523.62,-2334.65 R52.2@543.31,-2314.96
  Bottom Layer, Bottom w27.56: v1(480.32,-2334.65) 480.32,-2279.53 R26.1@488.19,-2271.65
"彦螯 88": L1.1 U3.7 | length 231
  Top Layer, Top w39.37: U3.7@6111.85,-2487.17 6111.85,-2376.34 L1.1@6196.85,-2291.34
"彦螯 92": C11.2 U2.4 | length 69.1
  Top Layer, Top w9.06: C11.2@397.95,-1122.24 398.01,-1122.3 U2.4@467.07,-1122.3
"彦螯 93": SPEAKER.1 U1.1 | length 208.8
  Bottom Layer, Bottom w9.06: U1.1@6433.86,-803.54 6435.5,-803.54 6435.5,-871.3 6464.2,-900 SPEAKER.1@6562.99,-900
"彦螯 94": SPEAKER.2 U1.3 | length 358.7
  Bottom Layer, Bottom w9.06: U1.3@6333.86,-803.54 6333.55,-803.85 6333.55,-885.12 6448.43,-1000 SPEAKER.2@6562.99,-1000
"彦螯 95": R8.1 U1.7 | length 117.7
  Bottom Layer, Bottom w9.06: R8.1@6133.86,-921.26 U1.7@6133.86,-803.54
"彦螯 98": C13.1 U1.8 | length 80.1
  Bottom Layer, Bottom w9.06: C13.1@6003.94,-803.15 6004.33,-803.54 U1.8@6083.86,-803.54
"彦螯 102": C26.1 U4.19 | length 322.1
  Top Layer, Top w9.06: U4.19@5929.13,-1529.53 6092.52,-1529.53 C26.1@6204.72,-1641.73
"彦螯 103": C26.2 C27.2 R5.2 R9.2 | length 248.6
  Top Layer, Top w9.06: C26.2@6322.83,-1641.73 6360.24,-1604.33 R5.2@6411.42,-1604.33 C27.2@6486.22,-1604.33 6488.19,-1606.3 R9.2@6555.12,-1606.3
"彦螯 104": C25.2 C28.2 R6.2 R7.2 | length 240.4
  Top Layer, Top w9.06: C25.2@6322.83,-1511.81 6338.58,-1527.56 C28.2@6413.39,-1527.56 6484.25,-1527.56 R6.2@6486.22,-1525.59 6553.15,-1525.59 R7.2@6555.12,-1523.62
"彦螯 105": J1.2 R7.1 | length 461.6
  Top Layer, Top w9.06: R7.1@6629.92,-1523.62 6669.29,-1523.62 6933.07,-1787.4 J1.2@6982.28,-1787.4
"彦螯 106": J1.3 R9.1 | length 736.9
  Top Layer, Top w9.06: R9.1@6629.92,-1606.3 6657.48,-1606.3 6783.46,-1732.28 6783.46,-1956.69 6982.28,-2155.51 J1.3@6982.28,-2181.1
"彦螯 107": R10.2 U4.18 | length 294.9
  Top Layer, Top w9.06: U4.18@5929.13,-1555.12 5972.44,-1555.12 6114.17,-1696.85 R10.2@6114.17,-1748.03
"彦螯 108": C29.1 R10.1 | length 103.3
  Top Layer, Top w9.06: R10.1@6188.98,-1748.03 6275.59,-1748.03 C29.1@6287.4,-1759.84
"彦螯 110": R11.2 U4.17 | length 352.9
  Top Layer, Top w9.06: U4.17@5929.13,-1580.71 5966.54,-1580.71 6066.93,-1681.1 6066.93,-1799.21 6086.61,-1818.9 R11.2@6114.17,-1818.9
"彦螯 114": C34.2 J3.3 R14.2 | length 973.8
  Top Layer, Top w9.06: C34.2@6196.85,-1240.16 6200.79,-1244.09 R14.2@6287.4,-1244.09 6527.56,-1244.09 6978.35,-1694.88 J3.3@6982.28,-1694.88
"彦螯 115": C33.2 J3.2 R15.2 | length 864.5
  Top Layer, Top w9.06: C33.2@6196.85,-1110.24 6208.66,-1122.05 R15.2@6287.4,-1122.05 6519.38,-1122.05 6698.51,-1301.18 J3.2@6982.28,-1301.18
"彦螯 116": C33.1 U4.9 | length 670.4
  Top Layer, Top w9.06: U4.9@5645.67,-1503.94 5711.56,-1503.94 v1(5725.64,-1489.86) ; v1(6010.69,-1116.14) 6072.84,-1116.14 C33.1@6078.74,-1110.24
  Mid-Layer 1 w9.06: v1(5725.64,-1489.86) 5725.64,-1390.02 6010.69,-1104.96 v1(6010.69,-1116.14)
"彦螯 117": C34.1 U4.10 | length 592.5
  Top Layer, Top w9.06: U4.10@5645.67,-1529.53 5714.74,-1529.53 v1(5727.1,-1541.89) ; v1(6010.69,-1245.84) 6073.06,-1245.84 C34.1@6078.74,-1240.16
  Mid-Layer 1 w9.06: v1(5727.1,-1541.89) 5761.54,-1541.89 6012.89,-1290.54 6012.89,-1248.04 v1(6010.69,-1245.84)
"彦螯 118": C35.1 U4.12 | length 147.9
  Top Layer, Top w9.06: U4.12@5645.67,-1580.71 5705.9,-1580.71 v1(5718.91,-1593.72)
  Bottom Layer, Bottom w9.06: v1(5718.91,-1593.72) 5718.91,-1644.11 C35.1@5732.28,-1657.48
"彦螯 134": J7.3 R34.2 U5.90 | length 3734.2
  Top Layer, Top w9.06: v1(4978.74,-1172.92) 4994.8,-1188.98 U5.90@5074.8,-1188.98
  Mid-Layer 1 w9.06: v1(4054.78,-254.96) 4059.49,-250.25 4139.6,-250.25 4872.43,-983.07 4872.43,-1060.04 4978.74,-1166.36 v1(4978.74,-1172.92)
  Mid-Layer 2 w9.06: J7.3@4939.37,-2313.39 4939.37,-2317.44 4923.04,-2301.12 4948.91,-2301.12 4983.95,-2266.07 4983.95,-2063.57 5573,-1474.52 5573,-1342.57 5552.58,-1322.15 5340.52,-1322.15 5283.97,-1378.7 5200.72,-1378.7 5057.78,-1235.76 5041.58,-1235.76 v1(4978.74,-1172.92)
  Bottom Layer, Bottom w9.06: R34.2@3795.08,-236.02 3825.82,-205.28 3992.68,-205.28 4042.37,-254.96 v1(4054.78,-254.96)
"彦螯 136": J7.7 R36.2 U5.72 | length 1187
  Top Layer, Top w9.06: U5.72@4948.82,-1531.5 4948.82,-1458.24 v1(4951.61,-1455.44)
  Mid-Layer 2 w9.06: J7.7@4739.37,-2313.39 4790.04,-2262.71 4790.04,-1974.72 4951.61,-1813.15 v1(4951.61,-1455.44)
  Bottom Layer, Bottom w9.06: R36.2@4738.38,-2149.87 4738.38,-2312.4 J7.7@4739.37,-2313.39
"彦螯 137": J7.9 R38.2 U5.76 | length 1207.8
  Top Layer, Top w9.06: v1(5049.31,-1479.62) 5064.36,-1464.57 U5.76@5074.8,-1464.57
  Mid-Layer 1 w9.06: v1(4870.02,-1747.84) 5049.31,-1568.56 v1(5049.31,-1479.62)
  Mid-Layer 2 w9.06: J7.9@4639.37,-2313.39 4689.37,-2263.38 4689.37,-2029.02 4870.02,-1848.37 v1(4870.02,-1747.84)
  Bottom Layer, Bottom w9.06: J7.9@4639.37,-2313.39 4654.24,-2298.52 R38.2@4654.24,-2147.02
"彦螯 138": J7.13 R37.2 U5.89 | length 2116.6
  Top Layer, Top w9.06: v1(4923.44,-1178.6) 4953.5,-1208.66 U5.89@5074.8,-1208.66
  Mid-Layer 1 w9.06: v1(4826.64,-1787.4) 4828.07,-1787.4 4828.07,-1700.75 4858.04,-1670.78 4858.04,-1488.49 4923.44,-1423.1 v1(4923.44,-1178.6)
  Mid-Layer 2 w9.06: J7.13@4439.37,-2313.39 4444.97,-2313.39 4525.33,-2233.02 4525.33,-2044.44 4782.37,-1787.4 v1(4826.64,-1787.4)
  Bottom Layer, Bottom w9.06: R37.2@3932.56,-2118.7 3959.27,-2118.7 4044.07,-2203.5 4329.49,-2203.5 J7.13@4439.37,-2313.39
"彦螯 139": R39.2 U5.34 U7.1 | length 1906.1
  Top Layer, Top w9.06: U5.34@4468.5,-1149.61 4527.56,-1149.61 4559.06,-1181.1 4720.47,-1181.1 4803.15,-1098.43 4843.37,-1098.43 v1(4847.46,-1102.52)
  Mid-Layer 2 w9.06: v1(3919.69,-432.46) 4330.1,-432.46 4874.02,-976.38 4874.02,-1075.96 v1(4847.46,-1102.52)
  Bottom Layer, Bottom w9.06: R39.2@3794,-468 3854.83,-468 U7.1@3909.45,-413.39 3919.69,-423.63 v1(3919.69,-432.46)
"彦螯 140": R40.1 U7.6 | length 110.6
  Bottom Layer, Bottom w9.06: U7.6@4279.53,-313.39 4388.19,-313.39 R40.1@4389.57,-314.76
"彦螯 141": R53.1 R58.2 T3.1 T3.7 | length 272.9
  Top Layer, Top w27.56: R53.1@875.98,-2277.56 938.98,-2277.56 R58.2@940.94,-2279.53 940.94,-2389.76 T3.1@933.07,-2397.64 888.58,-2442.13 T3.7@888.58,-2464.96
"彦螯 142": J8.1 R41.2 | length 171.5
  Top Layer, Top w9.06: R41.2@6897.64,-625.98 6933.07,-625.98 6976.38,-582.68 J8.1@7051.18,-582.68
"彦螯 143": J8.3 R42.1 | length 171.5
  Top Layer, Top w9.06: R42.1@6897.64,-476.38 6933.07,-476.38 6976.38,-519.69 J8.3@7051.18,-519.69
"彦螯 144": J8.2 R43.1 | length 153.5
  Top Layer, Top w9.06: R43.1@6897.64,-551.18 J8.2@7051.18,-551.18
"彦螯 145": R43.2 U5.70 | length 2996.9
  Top Layer, Top w9.06: U5.70@4909.45,-1531.5 4909.45,-1957.85 v1(4916.59,-1964.99) ; v1(6715.45,-553.37) 6717.64,-551.18 R43.2@6822.83,-551.18
  Mid-Layer 1 w9.06: v1(4916.59,-1964.99) 5420.83,-1964.99 6433.07,-952.76 6433.07,-835.75 v1(6715.45,-553.37)
"彦螯 146": R42.2 U5.71 | length 2850.4
  Top Layer, Top w9.06: U5.71@4929.13,-1531.5 4929.13,-1868.3 v1(4977.06,-1916.22) ; v1(6720.64,-477.34) 6721.6,-476.38 R42.2@6822.83,-476.38
  Mid-Layer 1 w9.06: v1(4977.06,-1916.22) 5081.98,-1916.22 6525.22,-472.98 6716.28,-472.98 v1(6720.64,-477.34)
"彦螯 148": R60.1 R63.2 U14.8 | length 520
  Top Layer, Top w23.62: v1(988.19,-1893.7) U14.8@988.98,-1893.7 ; U14.8@988.98,-1909.45 U14.8@988.98,-1893.7 ; 988.98,-1859.06 U14.8@988.98,-1893.7
  Top Layer, Top w27.56: R63.2@629.92,-1822.83 952.76,-1822.83 988.98,-1859.06
  Bottom Layer, Bottom w27.56: R60.1@968.5,-1980.32 987.01,-1961.81 987.01,-1894.88 v1(988.19,-1893.7)
"彦螯 150": C109.2 C110.2 R63.1 | length 326.8
  Top Layer, Top w27.56: C110.2@275.59,-1905.51 C109.2@275.59,-1822.83 R63.1@519.69,-1822.83
"彦螯 151": C109.1 C110.1 R19.1 R65.1 U15.6 | length 387.2
  Top Layer, Top w23.62: U15.6@214.96,-2118.5 v1@214.96,-2063.78
  Top Layer, Top w27.56: C109.1@165.35,-1822.83 C110.1@165.35,-1905.51 165.35,-1988.19 R19.1@214.96,-2037.8 ; R19.1@212.6,-2015.75 R19.1@214.96,-2037.8 ; v1@214.96,-2063.78 v1@214.96,-2059.06 ; v1(216.54,-2059.06) v1@214.96,-2059.06 ; v1@214.96,-2059.06 R19.1@214.96,-2037.8
  Bottom Layer, Bottom w27.56: v1(216.54,-2059.06) R65.1@216.54,-2011.81
"彦螯 152": C108.1 C111.1 R19.2 R64.2 U15.2 | length 331.7
  Top Layer, Top w23.62: U15.2@414.96,-2118.5 v1@414.96,-2071.65 ; v1@414.96,-2065.35 v1@414.96,-2071.65 ; v1(421.26,-2059.06) v1@414.96,-2071.65
  Top Layer, Top w27.56: R19.2@287.4,-2015.75 354.33,-2015.75 C111.1@358.27,-2019.69 C108.1@440.94,-2019.69 414.96,-2045.67 v1@414.96,-2065.35
  Bottom Layer, Bottom w27.56: v1(421.26,-2059.06) 425.2,-2055.12 R64.2@425.2,-2007.87
"彦螯 157": C77.1 U8.23 | length 152.3
  Top Layer, Top w9.06: U8.23@1391.73,-2330.71 1391.73,-2446.85 C77.1@1417.32,-2472.44
"彦螯 158": T2.1 T2.7 U8.22 | length 386.6
  Top Layer, Top w9.06: T2.7@1317.72,-2697.24 1317.72,-2674.41 T2.1@1362.2,-2629.92 1366.14,-2625.98 U8.22@1366.14,-2330.71
"彦螯 159": U9.5 U10.6 | length 427.9
  Top Layer, Top w9.06: U10.6@2035.43,-1704.72 2036.46,-1703.69 2147.3,-1703.69 2361.44,-1917.83 U9.5@2361.44,-1930.61
"彦螯 160": C55.1 L2.1 T2.4 T2.11 | length 257.6
  Top Layer, Top w27.56: L2.1@1007.87,-2874.02 C55.1@1070.87,-2874.02 1086.61,-2889.76 T2.4@1173.23,-2889.76 1217.72,-2845.28 T2.11@1217.72,-2822.44
"彦螯 162": U9.1 U10.8 | length 637.7
  Top Layer, Top w9.06: U10.8@2035.43,-1665.35 2101.95,-1665.35 v1(2109.75,-1657.56) ; v1(2447.71,-1783.08) 2511.44,-1719.36 U9.1@2511.44,-1639.27
  Mid-Layer 2 w9.06: v1(2109.75,-1657.56) 2235.28,-1783.08 v1(2447.71,-1783.08)
"彦螯 164": C75.1 U8.19 | length 94.6
  Top Layer, Top w9.06: U8.19@1289.37,-2330.71 1289.37,-2411.42 C75.1@1299.21,-2421.26
"彦螯 165": JTAG_FPGA.3 U10.20 | length 1543.1
  Top Layer, Top w9.06: U10.20@2035.43,-1429.13 2301.78,-1429.13 2301.78,-1439.57 v1(2307.08,-1444.88)
  Mid-Layer 1 w9.06: v1@2308.78,-1435.29 2657.81,-1784.32 2657.81,-2547.81 JTAG_FPGA.3@2659.01,-2549
"彦螯 166": JTAG_FPGA.5 R31.1 U10.18 | length 1873.3
  Top Layer, Top w9.06: U10.18@2035.43,-1468.5 2239.98,-1468.5 2247.86,-1476.38 2255.92,-1484.44 2275.4,-1484.44 v1(2275.59,-1484.25)
  Mid-Layer 1 w9.06: v1(2275.59,-1484.25) 2276.48,-1485.14 2276.48,-1489.86 2554.09,-1767.46 2554.09,-2544.08 JTAG_FPGA.5@2559.01,-2549
  Bottom Layer, Bottom w9.06: R31.1@2334.43,-2843.27 2334.43,-2779.17 2382.01,-2731.59 2479.4,-2731.59 2512.38,-2698.6 2512.38,-2595.63 JTAG_FPGA.5@2559.01,-2549
"彦螯 167": R30.1 U10.9 | length 512.7
  Top Layer, Top w9.06: v1(1875.17,-1620.56) 1900.28,-1645.67 U10.9@2035.43,-1645.67
  Bottom Layer, Bottom w9.06: v1(1875.17,-1620.56) 2069.36,-1620.56 2070.43,-1619.49 2161.63,-1619.49 2170.21,-1610.91 2170.21,-1573.47 R30.1@2174.17,-1569.51
"彦螯 168": R47.1 U10.14 | length 499.1
  Top Layer, Top w9.06: v1(1918.08,-1426.37) 1919.16,-1426.37 1919.16,-1514.35 1952.06,-1547.24 U10.14@2035.43,-1547.24
  Bottom Layer, Bottom w9.06: v1(1918.08,-1426.37) 2129.46,-1426.37 R47.1@2178.11,-1475.02
"彦螯 169": R48.1 U10.21 | length 206.8
  Top Layer, Top w9.06: U10.21@2035.43,-1409.45 2179.7,-1409.45 2179.7,-1407.4 2188.97,-1398.13 v1(2188.97,-1389.76)
  Bottom Layer, Bottom w9.06: v1@2193.38,-1389.76 R48.1@2193.38,-1350.81
"彦螯 179": C40.2 U5.48 | length 279.8
  Top Layer, Top w9.06: v1(4392.48,-1437.51) 4404.79,-1425.2 U5.48@4468.5,-1425.2
  Bottom Layer, Bottom w9.06: C40.2@4196.83,-1444.88 4204.2,-1437.51 v1(4392.48,-1437.51)
"彦螯 180": 13.8V.2 T1.4 | length 185.1
  Top Layer, Top w15.75: 6683.07,-2738.19 T1.4@6683.07,-2700.79
  Top Layer, Top w19.68: 13.8V.2@6682.87,-2885.83 6683.07,-2885.63 6683.07,-2738.19
"彦螯 181": 13.8V.1 T1.2 | length 234.2
  Top Layer, Top w9.06: 13.8V.1@6830.71,-2885.83 13.8V.1@6832.87,-2885.83
  Top Layer, Top w19.68: T1.2@6728.35,-2700.79 6736.22,-2700.79 6830.71,-2795.28 13.8V.1@6830.71,-2885.83
"彦螯 188": J9.2 T6.6 T6.10 | length 179.9
  Top Layer, Top w27.56: T6.10@451.57,-2802.76 451.57,-2825.59 T6.6@496.06,-2870.08 496.06,-2929.13 J9.2@471.26,-2953.94
"彦螯 191": C8.1 C9.2 C10.2 R3.1 R4.1 U2.5 XG1.6 | length 1129.5
  Top Layer, Top w9.06: R3.1@334.65,-1476.38 334.65,-1307.09 R4.1@251.97,-1224.41 272.02,-1204.35 640.57,-1204.35 ; U2.5@541.87,-1122.3 633.41,-1122.3 C8.1@641.73,-1130.63 640.57,-1131.78 640.57,-1204.35 ; XG1.6@637.8,-1448.82 XG1.6@629.92,-1456.69 641.73,-1444.88 C10.2@641.73,-1346.46 640.57,-1345.3 C9.2@640.57,-1253.57 640.57,-1204.35
"彦螯 219": C83.2 C85.1 L5.2 U13.2 U13.4 | length 683.6
  Top Layer, Top w19.68: L5.2@1500,-2814.96 1557.09,-2757.87 C85.1@1637.8,-2757.87 1742.13,-2757.87 C83.2@1744.09,-2759.84 1925.2,-2759.84 U13.4@1929.13,-2755.91 U13.2@1929.13,-2527.56
pads on no net: J1.4 J1.5 J1.6 J1.7 J1.8 J2.3 J2.4 J2.5 J2.6 J2.7 J2.8 J3.4 J3.5 J3.6 J3.7 J3.8 J5.4 J5.5 J5.6 J5.7 J5.8 J7.11 J7.17 J7.19 J8.4 J8.10 J8.11 JTAG_FPGA.6 JTAG_FPGA.7 JTAG_FPGA.8 T2.5 T3.5 T4.5 T6.2 T6.5 T6.8 U1.9 U1.10 U1.14 U1.16 U4.2 U4.13 U4.26 U5.2 U5.33 U5.35 U5.47 U5.83 U5.91 U8.25 U10.7 U10.10 U10.11 U10.23 U10.24 U10.25 U10.39 U10.125 U10.126 U10.127 U10.128 U10.129 U10.132 U10.133 U14.3 U14.5 U14.9 U14.10 U14.12 U14.13 U15.3 U15.5 U15.9 U15.10 U15.12 U15.13 U16.21 U16.22 U16.23 U16.24 U16.25 U16.26 U16.27 U16.28 U16.29 U16.30 U16.33 U16.34 U16.35 U16.36 U16.37 U16.38 U16.39 U16.40 U17.6 U17.7
copper on no net: | length 452.2
  Top Layer, Top w9.06: 401.57,-2677.56 401.57,-2610.24 ; 2035.43,-1330.71 2378.13,-1330.71 v4(2382.89,-1335.47) ; 4433.07,-1169.29 4468.5,-1169.29
  other v4: 1265.68,-1589.88 4752.13,-1247.29

## Polygon pours and split planes (outlines as drawn)
GND on Top Layer, Top "Top Layer, Top-GND" (solid, remove dead copper, pour order 0): 25.98,-25.98 7336.22,-25.98 7336.22,-3005.51 25.98,-3005.51
GND on Bottom Layer, Bottom "Bottom Layer, Bottom-GND" (solid, remove dead copper, pour order 4): 25.98,-25.98 7336.22,-25.98 7336.22,-3005.51 25.98,-3005.51
+3V3 on Bottom Layer, Bottom "Bottom Layer, Bottom-3V3" (solid, remove dead copper, pour order 2): 5118.11,-2204.72 5118.11,-2677.17 5590.55,-2677.17 5590.55,-2204.72

## Keep-outs
Keep-Out Layer, Board:
  lines w5: 0,-3031.5 0,0 7362.2,0 7362.2,-3031.5 0,-3031.5
  lines w5.51: 0,-3031.5 7362.2,-3031.5 7362.2,0 0,0 0,-3031.5

## Other copper
Top Layer, Top:
  rectangle net NetC124_2: 515.75,-531.5 830.71,-196.85
Bottom Layer, Bottom:
  rectangle net NetC124_2: 527.56,-515.75 818.9,-196.85

## Silkscreen, mask and mechanical layers (free items; w line width, h text height)
Bottom Overlay, Bot Silk:
  text "FRONT PANEL" at 3793.27,-1670.4 h65.62 r90
  text "UA3REO" at 2346.46,-2255.91 h82.02
  text "MOTHERBOARD rev17" at 2192.91,-2393.7 h49.21

## Text inside footprints (layer, text, board x,y; h text height)
BOOT0: Mechanical 2, Bot Assy "BOARD EDGE" at 5239.68,-1174.66 h16.41 r180
DEBUG_UART: Mechanical 2, Bot Assy "BOARD EDGE" at 4250.34,-2174.66 h16.41 r180
J1: Mechanical 1, Top Assy "BOARD" at 7408.35,-1902.5 h16.41 r90; Mechanical 1, Top Assy "EDGE" at 7441.52,-1895.9 h16.41 r90; Mechanical 1, Top Assy "BOARD" at 7408.35,-2158.39 h16.41 r90; Mechanical 1, Top Assy "EDGE" at 7441.52,-2151.8 h16.41 r90
J2: Mechanical 1, Top Assy "BOARD" at 7408.35,-2386.75 h16.41 r90; Mechanical 1, Top Assy "EDGE" at 7441.52,-2380.15 h16.41 r90; Mechanical 1, Top Assy "BOARD" at 7408.35,-2642.65 h16.41 r90; Mechanical 1, Top Assy "EDGE" at 7441.52,-2636.05 h16.41 r90
J3: Mechanical 1, Top Assy "BOARD" at 7408.35,-1416.28 h16.41 r90; Mechanical 1, Top Assy "EDGE" at 7441.52,-1409.68 h16.41 r90; Mechanical 1, Top Assy "BOARD" at 7408.35,-1672.17 h16.41 r90; Mechanical 1, Top Assy "EDGE" at 7441.52,-1665.58 h16.41 r90
J5: Mechanical 1, Top Assy "BOARD" at 7408.35,-930.06 h16.41 r90; Mechanical 1, Top Assy "EDGE" at 7441.52,-923.46 h16.41 r90; Mechanical 1, Top Assy "BOARD" at 7408.35,-1185.95 h16.41 r90; Mechanical 1, Top Assy "EDGE" at 7441.52,-1179.36 h16.41 r90
J8: Mechanical 1, Top Assy "BOARD" at 7357.07,-615.62 h16.41 r90; Mechanical 1, Top Assy "EDGE" at 7357.48,-500.28 h16.41 r90
J9: Mechanical 1, Top Assy "BOARD EDGE" at 335.35,-2889.51 h16.41
J10: Mechanical 1, Top Assy "BOARD EDGE" at 2893.75,-492.83 h16.41 r270
MIС_IN2: Mechanical 1, Top Assy "BOARD EDGE" at 6544.69,-1913.66 h16.41
PTT_IN: Mechanical 2, Bot Assy "BOARD EDGE" at 3905.13,-928.28 h16.41 r180
SPEAKER: Mechanical 2, Bot Assy "BOARD EDGE" at 6498.57,-864.09 h16.41 r90